# EAGLE board rev2 (EAGLE 7.2.0)
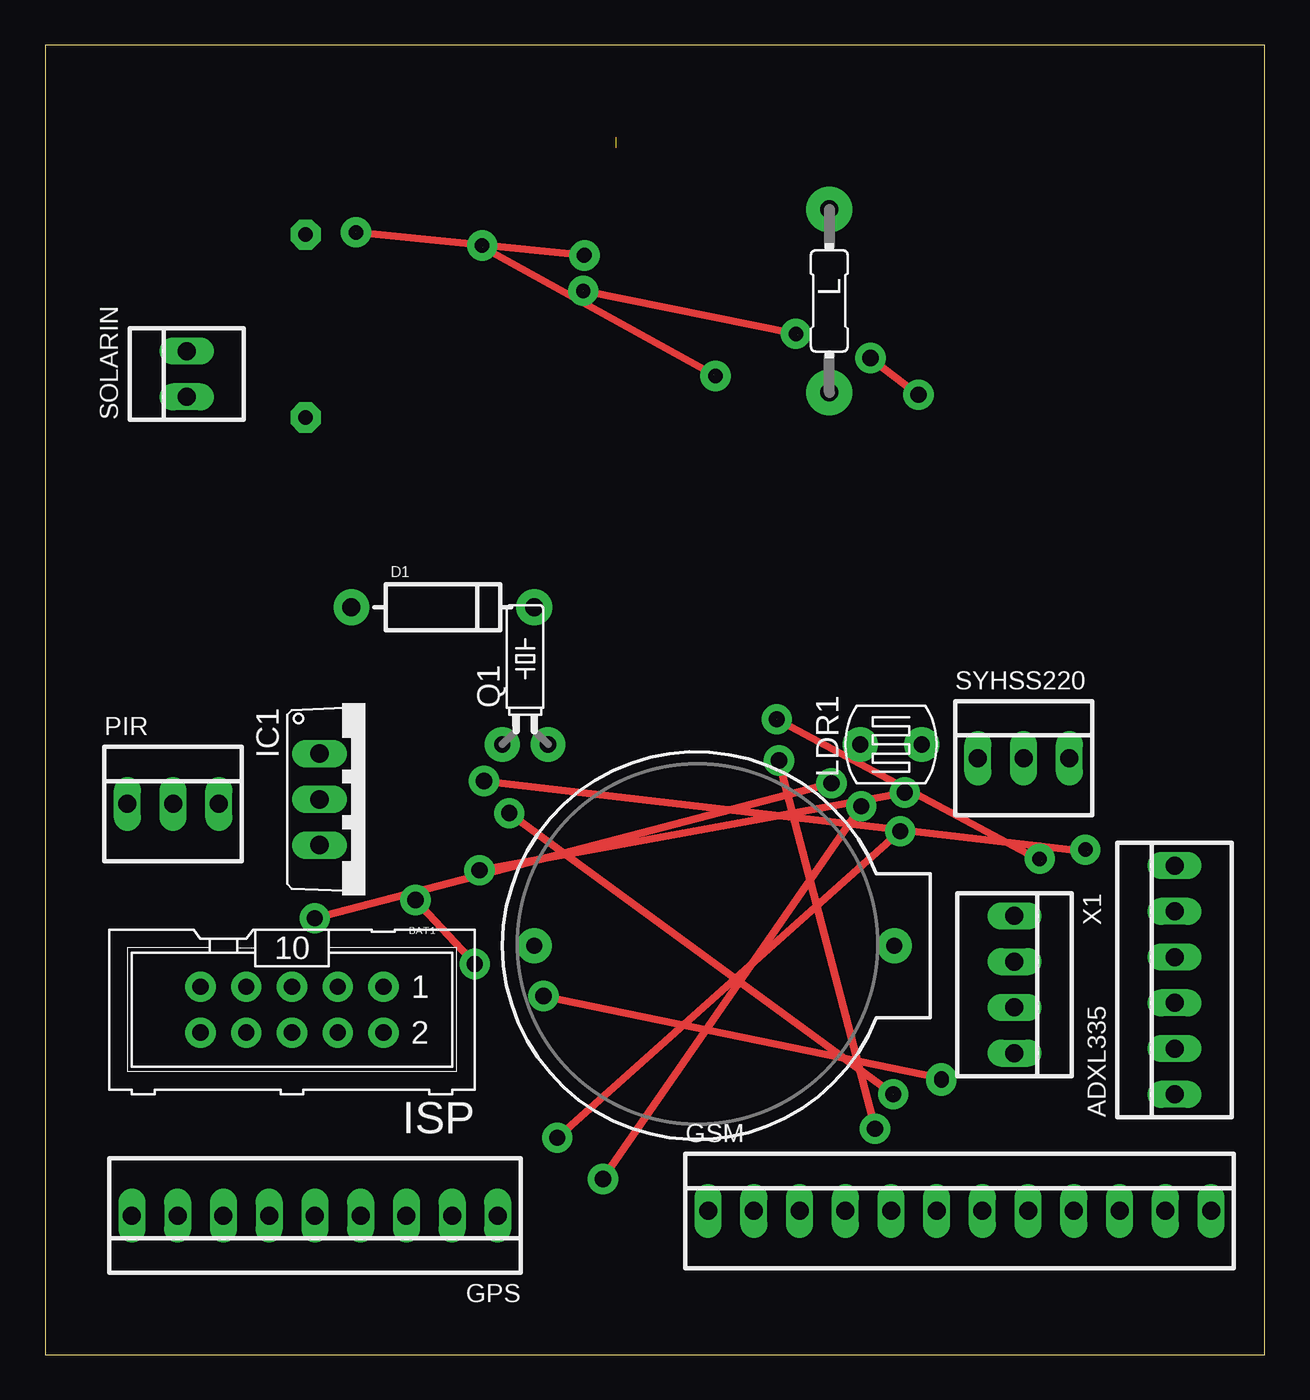
[diagram p0: board, top side]
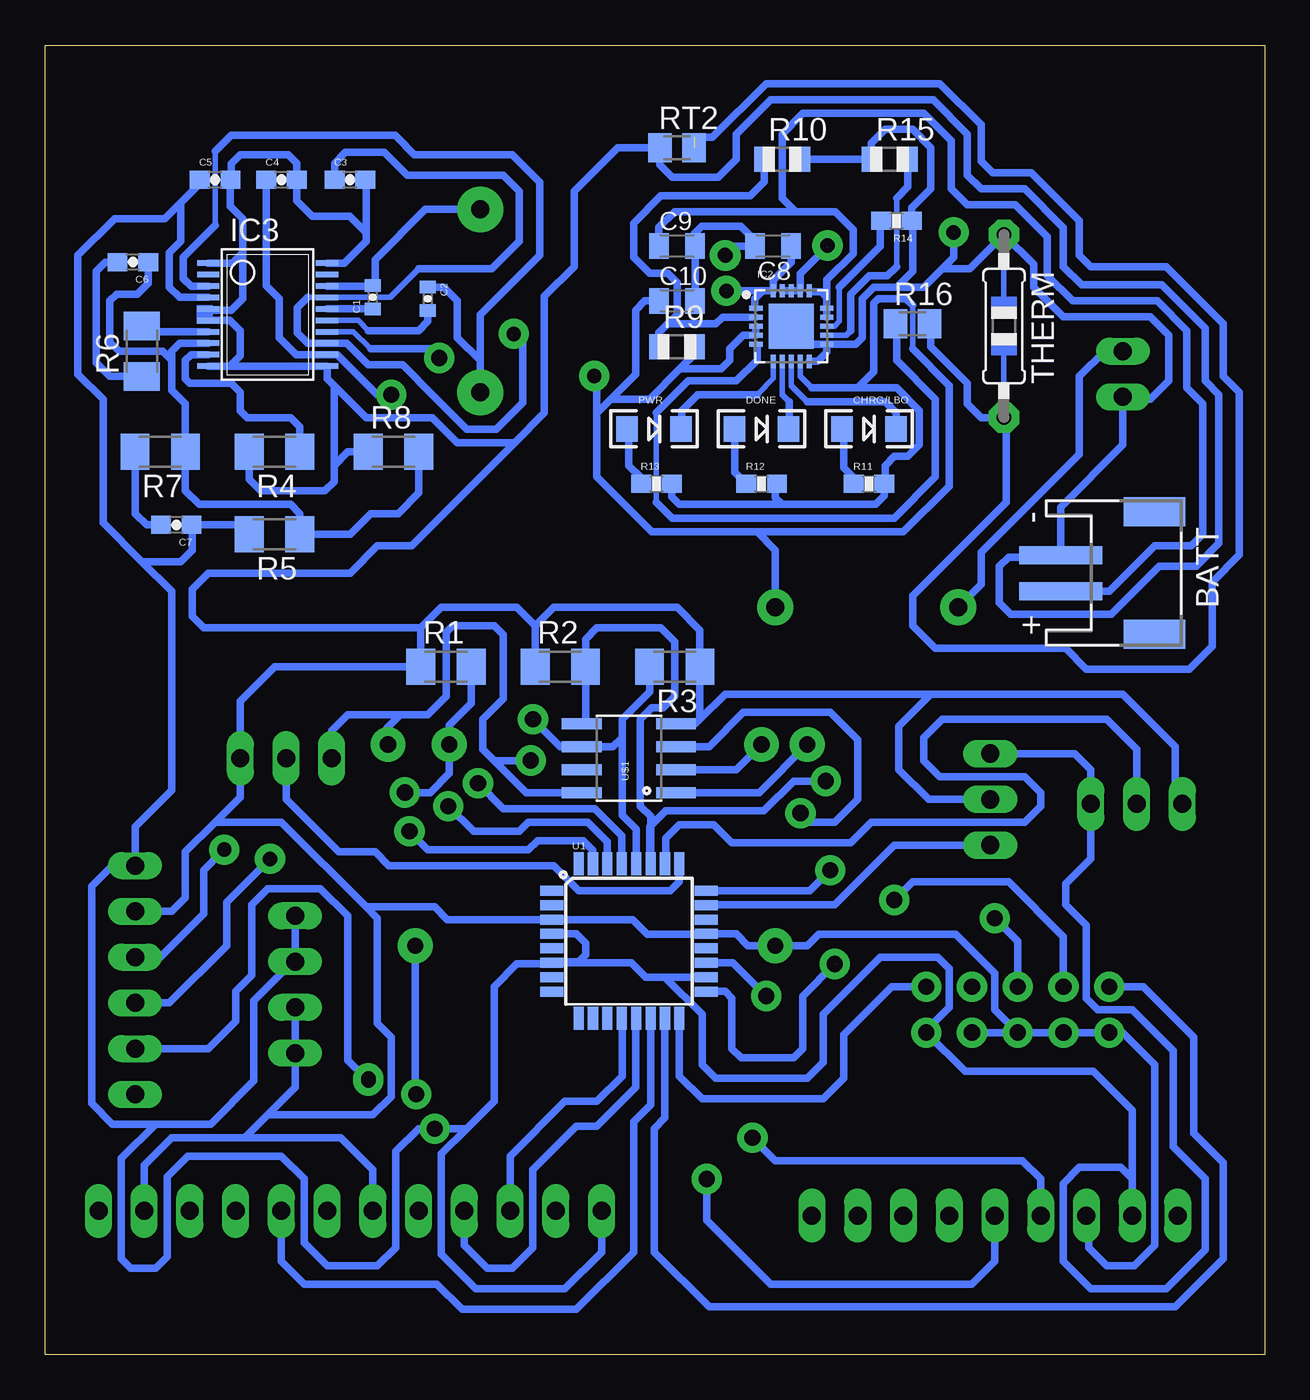
[diagram p1: board, bottom side, seen from below]

Size 67.74 x 72.76 mm. Coordinates in mm from the lower left corner, seen from the top.
Outline: 0,0 67.74,0 67.74,72.76 0,72.76 0,0
Copper layers (1*16): Top 0.035mm / dielectric 1.5mm / Bottom 0.035mm
Design rules "default": minimum track width 10mil, minimum drill 24mil, track to track 8mil, track to pad 8mil, pad to pad 8mil, via to via 8mil, smd to smd 8mil, copper to edge 40mil, drill to drill 8mil, minimum pad ring 10mil, minimum via ring 8mil, stop-mask expansion 4mil, vias tented up to drill 0mil, thermal gap 10mil

## Footprints (pad centres in the part's own frame; a part is rotated, then mirrored left to right if it is on the bottom)
22-23-2061 = drill 1 long: 1 -6.35,0; 2 -3.81,0; 3 -1.27,0; 4 1.27,0; 5 3.81,0; 6 6.35,0
BATTCOM_20MM_PTH = drill 0.9 pad 1.93: 1 20,0; 2 0,0
JST-PH-2-SMT-RA = smd 1 x 4.6: 1 1,-3.7; 2 -1,-3.7 | smd 1.6 x 3.4: NC1 -3.4,1.5; NC2 3.4,1.5
0402-CAP = smd 0.7 x 0.9: 1 -0.65,0; 2 0.65,0
0603-CAP = smd 1.1 x 1: 1 -0.85,0; 2 0.85,0
C0805K = smd 1.1 x 1.4: 1 -1,0; 2 1,0
LED-1206 = smd 1.2 x 1.4: A -1.5,0; C 1.5,0
DIODE-1N4001 = drill 1 pad 1.981: A -5.08,0; C 5.08,0
22-23-2091 = drill 1 long: 1 -10.16,0; 2 -7.62,0; 3 -5.08,0; 4 -2.54,0; 5 0,0; 6 2.54,0; 7 5.08,0; 8 7.62,0; 9 10.16,0
22-23-2121 = drill 1 long: 1 -13.97,0; 2 -11.43,0; 3 -8.89,0; 4 -6.35,0; 5 -3.81,0; 6 -1.27,0; 7 1.27,0; 8 3.81,0; 9 6.35,0; 10 8.89,0; 11 11.43,0; 12 13.97,0
TO220V = drill 1.016 long: 1 -2.54,-2.54; 2 0,-2.54; 3 2.54,-2.54
QFN20_4MM = smd 0.73 x 0.28: P$1 -1.965,1; P$2 -1.965,0.5; P$3 -1.965,0; P$4 -1.965,-0.5; P$5 -1.965,-1; P$11 1.965,-1; P$12 1.965,-0.5; P$13 1.965,0; P$14 1.965,0.5; P$15 1.965,1 | smd 0.28 x 0.73: P$6 -1,-1.965; P$7 -0.5,-1.965; P$8 0,-1.965; P$9 0.5,-1.965; P$10 1,-1.965; P$16 1,1.965; P$17 0.5,1.965; P$18 0,1.965; P$19 -0.5,1.965; P$20 -1,1.965 | smd 2.5 x 2.5: P$21 0,0
SSOP20 = smd 0.305 x 1.245: 1 -2.857,-3.302; 2 -2.222,-3.302; 3 -1.587,-3.302; 4 -0.952,-3.302; 5 -0.317,-3.302; 6 0.318,-3.302; 7 0.953,-3.302; 8 1.588,-3.302; 9 2.223,-3.302; 10 2.858,-3.302; 11 2.858,3.302; 12 2.223,3.302; 13 1.588,3.302; 14 0.953,3.302; 15 0.318,3.302; 16 -0.317,3.302; 17 -0.952,3.302; 18 -1.587,3.302; 19 -2.222,3.302; 20 -2.857,3.302
ML10 = drill 0.9 pad 1.676: 1 -5.08,-1.27; 2 -5.08,1.27; 3 -2.54,-1.27; 4 -2.54,1.27; 5 0,-1.27; 6 0,1.27; 7 2.54,-1.27; 8 2.54,1.27; 9 5.08,-1.27; 10 5.08,1.27
R0207/4 = drill 1 pad 2.54: 1 -5.08,0; 2 5.08,0
LDR338-54C = drill 0.9 pad 1.93: 1 0,1.702; 2 0,-1.702
22-23-2031 = drill 1 long: 1 -2.54,0; 2 0,0; 3 2.54,0
TC26H = drill 0.9 pad 1.93: 1 -1.27,0; 2 1.27,0
M1206 = smd 1.6 x 2: 1 -1.4,0; 2 1.4,0
M3216 = smd 1.6 x 2: 1 -1.4,0; 2 1.4,0
R0805 = smd 1.1 x 1.4: 1 -1,0; 2 1,0
0603-RES = smd 1.1 x 1: 1 -0.85,0; 2 0.85,0
M0805 = smd 1.3 x 1.6: 1 -0.95,0; 2 0.95,0
22-23-2021 = drill 1 long: 1 -1.27,0; 2 1.27,0
0805-THM = drill 0.813 pad 1.676 octagon: 1 -5.08,0; 2 5.08,0
TQFP32-08 = smd 1.27 x 0.559: 1 -4.293,2.8; 2 -4.293,2; 3 -4.293,1.2; 4 -4.293,0.4; 5 -4.293,-0.4; 6 -4.293,-1.2; 7 -4.293,-2; 8 -4.293,-2.8; 17 4.293,-2.8; 18 4.293,-2; 19 4.293,-1.2; 20 4.293,-0.4; 21 4.293,0.4; 22 4.293,1.2; 23 4.293,2; 24 4.293,2.8 | smd 0.559 x 1.27: 9 -2.8,-4.293; 10 -2,-4.293; 11 -1.2,-4.293; 12 -0.4,-4.293; 13 0.4,-4.293; 14 1.2,-4.293; 15 2,-4.293; 16 2.8,-4.293; 25 2.8,4.293; 26 2,4.293; 27 1.2,4.293; 28 0.4,4.293; 29 -0.4,4.293; 30 -1.2,4.293; 31 -2,4.293; 32 -2.8,4.293
SO08 = smd 0.61 x 2.21: 1 -1.905,-2.616; 2 -0.635,-2.616; 3 0.635,-2.616; 4 1.905,-2.616; 5 1.905,2.616; 6 0.635,2.616; 7 -0.635,2.616; 8 -1.905,2.616
22-23-2041 = drill 1 long: 1 -3.81,0; 2 -1.27,0; 3 1.27,0; 4 3.81,0

## Placement (x,y rotation side)
ADXL335  [22-23-2061]  62.74,20.83 90 top
BAT1  [BATTCOM_20MM_PTH]  27.18,22.73 0 top
BATT  [JST-PH-2-SMT-RA]  7.62,43.43 270 bottom
C1  0.1uF  [0402-CAP]  49.53,58.75 90 bottom
C2  0.1uF  [0402-CAP]  46.48,58.67 270 bottom
C3  4.7uF  [0603-CAP]  50.8,65.28 0 bottom
C4  4.7uF  [0603-CAP]  54.61,65.28 0 bottom
C5  47uF  [0603-CAP]  58.29,65.28 0 bottom
C6  3.3nF  [0603-CAP]  62.87,60.71 180 bottom
C7  33pF  [0603-CAP]  60.45,46.1 180 bottom
C8  10uF  [C0805K]  27.3,61.59 180 bottom
C9  10uF  [C0805K]  32.64,61.59 0 bottom
C10  10uF  [C0805K]  32.64,58.55 0 bottom
CHRG/LBO  YELLOW  [LED-1206]  21.97,51.44 0 bottom
D1  [DIODE-1N4001]  22.1,41.53 0 top
DONE  GREEN  [LED-1206]  27.94,51.44 0 bottom
GPS  22-23-2091  [22-23-2091]  14.99,7.75 180 top
GSM  22-23-2121  [22-23-2121]  50.8,8 0 top
IC1  LM35DT  [TO220V]  17.78,30.86 270 top
IC2  MCP73871  [QFN20_4MM]  26.29,57.15 0 bottom
IC3  PLL1700E  [SSOP20]  55.37,57.78 270 bottom
ISP  [ML10]  13.72,19.18 180 top
L  10uH  [R0207/4]  43.56,58.55 270 top
LDR1  [LDR338-54C]  46.99,33.91 90 top
PIR  22-23-2031  [22-23-2031]  7.11,30.61 0 top
PWR  RED  [LED-1206]  33.91,51.44 0 bottom
Q1  [TC26H]  26.67,33.91 0 top
R1  10Kohm  [M1206]  45.47,38.23 0 bottom
R2  4.7Kohm  [M1206]  39.12,38.23 0 bottom
R3  4.7Kohm  [M1206]  32.77,38.23 180 bottom
R4  47K  [M3216]  54.99,50.16 180 bottom
R5  1M  [M3216]  54.99,45.59 180 bottom
R6  60.4Kohm  [M3216]  62.36,55.75 90 bottom
R7  15Kohm  [M1206]  61.34,50.16 180 bottom
R8  249Kohm  [M1206]  48.39,50.16 0 bottom
R9  270K  [R0805]  32.64,56.01 0 bottom
R10  100K  [R0805]  26.8,66.42 0 bottom
R11  470  [0603-RES]  21.97,48.39 0 bottom
R12  470  [0603-RES]  27.94,48.39 0 bottom
R13  470  [0603-RES]  33.78,48.39 0 bottom
R14  8.2K  [0603-RES]  20.45,62.99 180 bottom
R15  100K  [R0805]  20.83,66.42 0 bottom
R16  1K  [M0805]  19.56,57.28 0 bottom
RT2  150K  [M0805]  32.64,67.06 0 bottom
SOLARIN  22-23-2021  [22-23-2021]  7.87,54.48 90 top
SYHSS220  22-23-2031  [22-23-2031]  54.36,33.15 0 top
THERM  10K  [0805-THM]  14.48,57.15 270 bottom
U1  ATMEGA328P_TQFP  [TQFP32-08]  35.31,22.99 0 bottom
U$1  DS1307SO8  [SO08]  35.31,33.15 90 bottom
X1  22-23-2041  [22-23-2041]  53.85,20.57 270 top

## Library data of the parts
ADXL335 = con-molex; MF: MOLEX; MPN: 22-23-2061; OC_FARNELL: 1462922; OC_NEWARK: 27C1933
BAT1 C5 D1 U$1 = SparkFun
BATT C8-C10 IC2 R9 R10 R15 R16 RT2 THERM = adafruit
C1 C2 = SparkFun-Capacitors; PROD_ID: CAP-12416
C3 C4 = SparkFun-Capacitors; PROD_ID: CAP-08280
C6 = SparkFun-Capacitors; PROD_ID: CAP-09633
C7 = SparkFun-Capacitors; PROD_ID: CAP-10142
CHRG/LBO = SparkFun-LED; PROD_ID: DIO-00820
DONE = SparkFun-LED; PROD_ID: DIO-00862
GPS = con-molex; MF: MOLEX; MPN: 22-23-2091; OC_FARNELL: 1756827; OC_NEWARK: 56H0450
GSM = con-molex; MF: MOLEX; MPN: 22-23-2121; OC_FARNELL: 1462935; OC_NEWARK: 56H0456
IC1 = lm35
IC3 = texas; MF: TEXAS INSTRUMENT CONNECTORS; MPN: PLL1700E; OC_FARNELL: unknown; OC_NEWARK: 36K3452
ISP = con-harting-ml; OC_FARNELL: unknown; OC_NEWARK: unknown
L LDR1 = gm-resistors
PIR SYHSS220 = con-molex; MF: MOLEX; MPN: 22-23-2031; OC_FARNELL: 1462950; OC_NEWARK: 30C0862
PWR = SparkFun-LED; PROD_ID: DIO-00809
Q1 = crystal; OC_FARNELL: unknown; OC_NEWARK: unknown
R1-R8 = resistor
R11-R13 = SparkFun-Resistors; PROD_ID: RES-07869
R14 = SparkFun-Resistors; PROD_ID: RES-10646
SOLARIN = con-molex; MF: MOLEX; MPN: 22-23-2021; OC_FARNELL: 1462926; OC_NEWARK: 25C3832
U1 = SparkFun-DigitalIC; PROD_ID: IC-09069
X1 = con-molex; MF: MOLEX; MPN: 22-23-2041; OC_FARNELL: 1462920; OC_NEWARK: 38C0355

## Nets
BATT: BATT.1 C9.1 IC2.P$14 IC2.P$15 IC2.P$16
GND: ADXL335.5 BAT1.2 BATT.2 C3.2 C4.2 C5.2 C8.2 C9.2 C10.2 GPS.7 GSM.6 GSM.11 IC1.2 IC2.P$10 IC2.P$11 IC2.P$21 IC3.1 IC3.5 IC3.6 IC3.10 IC3.11 IC3.20 ISP.4 ISP.6 ISP.8 ISP.10 PIR.1 R1.1 R2.1 R3.1 R4.2 R8.1 R10.2 R14.1 R15.1 RT2.1 SOLARIN.1 SYHSS220.3 THERM.1 U1.3 U1.21 U$1.4 X1.3 X1.4
N$3: GPS.5 U1.30
N$4: IC1.3 U1.23
N$5: LDR1.1 R1.2 U1.24
N$6: GPS.6 U1.31
N$7: SYHSS220.2 U1.25
N$8: PIR.2 U1.26
N$9: ADXL335.2 U1.19
N$10: ADXL335.3 R3.2 U1.28 U$1.6
N$11: GSM.3 U1.12
N$12: Q1.1 U$1.1
N$13: Q1.2 U$1.2
N$14: GSM.4 U1.13
N$15: BAT1.1 U$1.3
N$16: GSM.8 U1.14
N$17: IC2.P$2 R9.1 R10.1
N$18: IC2.P$6 PWR.C
N$20: ISP.1 U1.16
N$21: ISP.5 U1.29
N$22: ISP.7 U1.17
N$23: ISP.9 U1.15
N$27: DONE.C IC2.P$7
N$28: CHRG/LBO.C IC2.P$8
N$29: C1.1 IC3.16
N$30: CHRG/LBO.A R11.1
N$31: DONE.A R12.1
N$32: C2.2 IC3.15
N$33: PWR.A R13.1
N$34: IC2.P$12 R15.2
N$35: C1.2 IC3.18 L.1
N$36: C2.1 IC3.3 L.2
N$37: ADXL335.6 C5.1 C7.1 GPS.8 GSM.1 IC1.1 IC3.4 ISP.2 LDR1.2 PIR.3 R5.2 SYHSS220.1 U1.4 U1.6 U1.18 U$1.8 X1.1 X1.2
N$38: C6.1 IC3.8 R5.1 R7.1 R8.2
N$40: C6.2 R6.1
N$41: IC3.7 R6.2
N$42: ADXL335.4 R2.2 U1.27 U$1.5
N$43: C7.2 R7.2
N$44: C4.1 IC3.12 IC3.14
N$45: IC3.9 R4.1
N$46: IC2.P$13 R14.2
N$47: IC2.P$5 R16.1
N$48: R16.2 RT2.2 THERM.2
N$49: D1.A SOLARIN.2
OUT: C3.1 C8.1 IC2.P$1 IC2.P$20 IC3.13 IC3.17
VCC: C10.1 D1.C IC2.P$3 IC2.P$4 IC2.P$9 IC2.P$17 IC2.P$18 IC2.P$19 R9.2 R11.2 R12.2 R13.2

## Tracks (layer width: path | path; a pad name or v marks a point on that pad's centre or on a via)
BATT
  Bottom 0.406: 24.32,58.74 IC2.P$15 IC2.P$14 | IC2.P$16 25.23,59.05 24.64,59.05 24.32,58.74 | C9.1 33.64,62.63 32.77,63.5 26.04,63.5 | BATT.1 8.62,42.43 6.1,44.96 4.06,44.96 3.43,45.59 3.43,52.83 4.32,53.72 4.32,56.9 5.97,58.55 10.67,58.55 12.06,59.94 12.06,62.1 13.84,63.88 16.51,63.88 17.4,64.77 17.4,67.44 18.92,68.96 25.65,68.96 26.8,67.82 26.8,64.26 26.04,63.5 | 26.04,63.5 23.85,63.5 22.86,62.51 22.86,61.16 24.31,59.72 24.31,58.73 24.32,58.74
GND  (via drill 0.8 pad 1.68)  (1 unrouted)
  Top 0.406: v29.97,61.09 17.27,62.36
  Bottom 0.406: ISP.6 ISP.8 ISP.10 7.87,17.91 6.1,16.13 6.1,6.1 7.24,4.95 8.76,4.95 9.78,5.97 9.78,7.62 GPS.7 | ISP.6 ISP.4 | 46.86,40.39 46.87,40.38 R1.1 54.99,38.23 56.9,36.32 SYHSS220.3 56.9,30.99 58.29,29.59 | R3.1 31.37,40.26 32.64,41.53 39.5,41.53 40.52,40.51 R2.1 40.51,40.51 41.53,41.53 45.72,41.53 46.86,40.39 | R3.1 | R3.1 31.37,35.31 | 31.37,35.31 31.62,35.05 U$1.4 | IC1.2 18.67,30.86 20.32,32.51 20.32,34.92 18.54,36.7 | 18.54,36.7 7.87,36.7 4.95,33.78 4.95,30.99 PIR.1 | 58.67,57.53 IC3.6 58.61,57.47 | 56.77,61.21 56.77,63.12 57.44,63.79 C5.2 57.4,65.32 57.4,66.17 56.9,66.67 54.23,66.67 53.76,66.21 C4.2 53.76,64.1 52.91,63.25 50.83,63.25 49.91,62.33 | IC3.10 57.47,54.93 | 57.47,54.93 56.9,55.5 56.9,56.9 57.47,57.47 58.61,57.47 | R8.1 50.93,50.16 51.69,49.4 | 57.47,54.93 IC3.11 52.07,54.23 51.69,53.85 | R4.2 56.39,48.64 55.75,48.01 52.2,48.01 51.69,48.51 51.69,49.4 | IC3.1 57.34,60.64 56.77,61.21 | 56.77,61.21 56.77,58.67 57.4,58.04 58.61,58.04 IC3.5 58.67,57.53 | 58.61,57.47 58.67,57.53 | IC3.20 51.12,60.64 49.91,61.85 49.91,62.33 | 49.91,62.33 49.91,65.24 C3.2 | BAT1.2 27.05,22.73 | ISP.6 14.99,19.18 14.99,21.21 17.14,23.37 24.77,23.37 25.4,22.73 BAT1.2 | 49.91,24.89 46.1,24.89 45.4,24.19 U1.3 35.11,24.19 34.29,23.37 31.03,23.37 U1.21 29.36,23.39 28.7,22.73 BAT1.2 | 41.66,50.67 44.83,50.67 46.23,52.07 49.91,52.07 51.69,53.85 | 41.66,50.67 40.01,52.32 40.01,58.8 38.35,60.45 38.35,64.64 35.94,67.06 RT2.1 33.59,66.1 32.89,65.41 30.35,65.41 29.34,66.42 29.34,67.82 27.43,69.72 18.41,69.72 16.51,67.82 16.51,65.53 15.75,64.77 13.34,64.77 11.18,62.61 11.18,60.45 10.16,59.44 5.71,59.44 3.3,57.02 3.3,54.1 2.54,53.34 2.54,45.09 3.81,43.81 5.84,43.81 8.51,41.15 14.1,41.15 14.73,41.78 14.73,43.81 14.22,44.32 11.43,44.32 BATT.2 11.32,47.1 7.87,50.55 7.87,53.09
  Bottom 0.406: 41.66,50.67 47.37,44.96 49.28,44.96 50.8,43.43 58.67,43.43 59.56,42.55 59.56,41.02 58.93,40.39 46.86,40.39 | 18.54,36.7 29.97,36.7 31.37,35.31 | 51.69,49.4 51.69,53.85 | GSM.11 62.23,10.54 60.71,12.06 56.64,12.06 | 56.64,12.06 55.37,13.34 | 55.37,13.34 53.85,14.86 X1.4 X1.3 | GSM.6 49.53,10.29 51.31,12.06 56.64,12.06 | 58.29,29.59 59.94,27.94 59.94,25.4 60.71,24.64 ADXL335.5 | 58.29,29.59 54.61,29.59 49.91,24.89 | 49.91,24.89 49.28,24.26 49.28,18.41 48.51,17.65 48.51,14.35 49.53,13.34 55.37,13.34 | C10.2 C9.2 31.67,61.63 31.67,62.28 31.27,62.69 29.11,62.69 28.3,61.88 C8.2 29.46,61.59 v29.97,61.09 | IC2.P$11 24.32,55.69 24.82,55.19 IC2.P$10 | IC2.P$11 25.29,56.15 IC2.P$21 25.27,56.13 22.73,56.13 22.72,56.15 | IC2.P$11 22.72,56.15 | 22.72,56.15 22.35,56.52 22.35,58.67 21.72,59.31 20.45,59.31 | R10.2 R15.1 21.84,66.44 21.84,67.31 21.08,68.07 19.56,68.07 18.54,67.06 18.54,64.77 19.6,63.72 R14.1 19.56,62.95 19.56,60.2 20.45,59.31 | 20.45,59.31 18.92,59.31 17.91,60.33 | 17.91,60.33 16.38,60.33 THERM.1 12.83,60.58 12.83,59.31 11.18,57.66 6.35,57.66 5.33,56.64 5.33,54.1 6.35,53.09 7.87,53.09 | 7.87,53.09 SOLARIN.1 | 17.91,60.33 17.27,60.96 17.27,62.36
N$1  (via drill 0.9 pad 1.68)
  other vias: 23.88,21.72
N$2  (via drill 0.8 pad 1.68)
  other vias: 57.78,28.07
N$3  (via drill 0.9 pad 1.68)
  Top 0.406: v30.99,9.78 v45.34,30.48
  Bottom 0.406: GPS.5 14.99,5.21 16.26,3.94 27.43,3.94 30.99,7.49 v30.99,9.78 | U1.30 36.51,28.5 37.59,29.59 40.89,29.59 41.4,29.08 43.94,29.08 v45.34,30.48
N$4
  Bottom 0.406: IC1.3 20.57,28.32 23.88,25.02 30.98,25.02 U1.23
N$5  (via drill 0.9 pad 1.68)
  Top 0.406: v24.13,26.92 v47.75,31.24
  Bottom 0.406: 43.69,37.85 R1.2 | 44.2,38.1 R1.2 | R1.2 44.07,36.2 45.29,34.98 LDR1.1 45.29,32.31 46.35,31.24 v47.75,31.24 47.88,31.24 | U1.24 25.27,25.79 v24.13,26.92
N$6  (via drill 0.9 pad 1.68)
  Top 0.406: v28.45,12.06 v47.5,29.08
  Bottom 0.406: GPS.6 12.45,9.78 13.46,10.79 27.18,10.79 v28.45,12.06 | U1.31 37.31,28.04 37.85,28.57 40.39,28.57 40.89,28.07 46.48,28.07 v47.5,29.08
N$7
  Bottom 0.406: SYHSS220.2 54.36,30.86 51.44,27.94 49.4,27.94 48.64,27.18 39.5,27.18 38.1,25.78 33.02,25.78 32.51,26.29 U1.25
N$8
  Bottom 0.406: PIR.2 7.11,33.66 8.76,35.31 17.91,35.31 18.92,34.29 18.92,33.02 18.03,32.13 13.34,32.13 12.45,31.24 12.45,30.48 13.34,29.59 21.84,29.59 22.99,28.45 29.59,28.45 30.61,29.46 32.51,29.46 33.27,28.7 33.27,27.31 U1.26
N$9  (via drill 0.8 pad 1.68, 0.9 pad 1.68)
  Top 0.406: v49.78,15.37 v27.69,19.94
  Bottom 0.406: U1.19 29.53,21.79 v27.69,19.94 | ADXL335.2 58.67,17.02 57.15,18.54 57.15,20.19 56.26,21.08 56.26,25.02 55.37,25.91 52.45,25.91 50.93,24.38 50.93,16.38 49.91,15.37 v49.78,15.37
N$10  (2 unrouted)
  Top 0.406: 40.64,35.31 55.37,27.43
  Bottom 0.406: R3.2 34.17,36.83 35.69,35.31 35.69,34.29 | 34.92,27.3 U1.28 34.91,29.19 35.69,29.97 35.69,34.29 | 35.69,34.29 36.2,33.78 U$1.6 39.12,33.78 40.64,35.31 | ADXL335.3 60.83,19.56 57.66,22.73 57.66,25.15 55.37,27.43
N$11
  Bottom 0.406: GSM.3 41.91,11.05 38.86,14.1 37.08,14.1 35.69,15.49 35.69,18.68 U1.12
N$12
  Bottom 0.406: U$1.1 28.07,31.24 Q1.1
N$13
  Bottom 0.406: U$1.2 29.34,32.51 Q1.2
N$14
  Bottom 0.406: GSM.4 44.45,6.1 43.18,4.83 41.78,4.83 40.64,5.97 40.64,10.29 38.23,12.7 37.08,12.7 34.92,14.86 34.92,18.68 U1.13
N$15  (via drill 0.9 pad 1.68)  (1 unrouted)
  Top 0.406: 47.12,14.48 v25.78,30.1
  Bottom 0.406: U$1.3 30.86,33.78 28.96,35.69 24.13,35.69 22.61,34.16 22.61,30.86 23.88,29.59 25.27,29.59 v25.78,30.1 | BAT1.1 47.18,14.54 47.12,14.48
N$16
  Bottom 0.406: U1.14 34.11,13.9 35.05,12.95 35.05,5.71 38.23,2.54 44.58,2.54 45.97,3.94 53.34,3.94 54.61,5.21 GSM.8 54.61,6.48
N$17
  Bottom 0.406: IC2.P$2 30.11,57.65 30.48,57.28 33.15,57.28 | R9.1 33.66,56.02 33.66,56.77 33.15,57.28 | 27.81,66.42 R10.1 27.8,65.17 28.57,64.39 33.53,64.39 35.05,62.87 35.05,60.96 34.16,60.07 33.15,60.07 32.64,59.56 32.64,57.78 33.15,57.28
N$18
  Bottom 0.305: IC2.P$6 27.29,54.24 28.19,53.34
  Bottom 0.406: 28.19,53.34 31.5,53.34 32.38,52.45 32.38,51.46 PWR.C
N$19  (via drill 0.8 pad 1.68)
  other vias: 49.78,15.24
N$20
  Bottom 0.406: U1.16 32.51,15.49 31.24,14.22 24.51,14.22 23.37,15.37 23.37,17.78 20.7,20.45 ISP.1
N$21  (via drill 0.9 pad 1.68)
  Top 0.406: v14.99,24.26 v43.69,31.75
  Bottom 0.406: 35.69,27.26 U1.29 35.71,28.85 37.21,30.35 42.29,30.35 v43.69,31.75 | ISP.5 13.72,22.99 v14.99,24.26
N$22  (via drill 0.9 pad 1.68)  (1 unrouted)
  Top 0.406: 23.88,21.72 v20.57,25.27
  Bottom 0.406: ISP.7 11.18,23.24 14.22,26.29 19.56,26.29 v20.57,25.27 | 23.88,21.72 25.65,19.94 25.65,17.02 26.16,16.51 29.08,16.51 29.59,17.02 29.59,19.81 29.97,20.19 U1.17
N$23
  Bottom 0.406: ISP.9 6.73,20.45 3.94,17.65 3.94,12.32 2.29,10.67 2.29,5.33 4.95,2.67 30.86,2.67 33.91,5.71 33.91,12.57 33.31,13.18 U1.15
N$24  (via drill 0.9 pad 1.68)
  other vias: 47.12,14.48
N$25  (via drill 0.9 pad 1.68)
  other vias: 40.64,35.31
N$26  (via drill 0.8 pad 1.68)
  other vias: 55.24,27.56
N$27
  Bottom 0.305: IC2.P$7 26.79,53.33 26.42,52.96
  Bottom 0.406: 26.42,52.96 26.42,51.46 DONE.C
N$28
  Bottom 0.305: IC2.P$8 26.29,53.85 25.4,52.96
  Bottom 0.406: CHRG/LBO.C 20.47,52.35 21.08,52.96 25.4,52.96
N$29
  Bottom 0.406: 49.48,58.1 C1.1 IC3.16
N$30
  Bottom 0.406: R11.1 22.82,48.73 23.37,49.28 23.37,51.33 CHRG/LBO.A
N$31
  Bottom 0.406: DONE.A 29.44,49.04 R12.1
N$32
  Bottom 0.305: IC3.15 50.35,57.47 49.78,56.9
  Bottom 0.406: C2.2 46.48,57.4 46.99,56.9 49.78,56.9
N$33
  Bottom 0.406: R13.1 34.63,48.73 35.31,49.4 35.31,51.33 PWR.A
N$34
  Bottom 0.305: IC2.P$12 23.23,56.65 22.99,56.9 | 20.45,60.45 20.45,64.26
  Bottom 0.406: 22.99,56.9 22.99,58.93 21.97,59.94 20.95,59.94 20.45,60.45 | 20.45,64.26 19.81,64.9 19.81,66.41 R15.2
N$35
  Bottom 0.406: 49.45,59.37 C1.2 | L.1 46.61,63.63 49.4,60.83 49.4,59.53 C1.2 | IC3.18 49.56,59.37 C1.2
N$36
  Bottom 0.305: 58.29,62.74 58.29,66.85
  Bottom 0.406: 59.87,59.61 60.07,59.82 | 60.07,59.82 60.07,60.96 58.29,62.74 | L.2 43.56,55.24 | 43.56,55.24 44.83,56.52 44.83,58.55 45.59,59.31 46.47,59.31 C2.1 | IC3.3 59.63,59.37 59.87,59.61 | 59.87,59.61 59.89,59.61 60.07,59.79 60.07,59.82 | 58.29,66.85 57.4,67.74 48.28,67.74 47.7,67.16 47.7,67.13 47.24,66.67 41.78,66.67 40.26,65.15 40.26,61.09 43.56,57.78 43.56,55.24
N$37  (via drill 0.9 pad 1.68)
  Top 0.406: v46.1,12.57 v40.77,33.02
  Bottom 0.406: GSM.1 36.83,5.71 38.86,3.68 43.81,3.68 45.72,5.59 45.72,11.18 44.32,12.57 | 39.67,21.72 41.53,21.72 42.8,20.45 42.8,14.1 44.32,12.57 | 39.67,21.72 U1.6 | GPS.8 7.37,9.78 | 7.37,9.78 7.37,13.59 9.53,15.75 16.64,15.75 ISP.2 18.8,18.03 17.53,19.3 17.53,21.46 18.16,22.1 21.34,22.1 24.51,18.92 24.51,16.26 25.4,15.37 30.48,15.37 31.24,16.13 31.24,18.92 33.31,20.99 | IC1.1 10.54,33.4 9.65,32.51 PIR.3 9.65,27.56 11.05,26.16 11.05,25.02 9.91,23.88 9.91,19.81 9.27,19.18 7.37,19.18 5.08,16.89 5.08,11.56 3.3,9.78 3.3,5.84 5.46,3.68 9.65,3.68 11.18,5.21 11.18,9.53 10.29,10.41 8,10.41 7.37,9.78 | C5.1 59.14,65.06 60.2,64.01 | IC3.4 60.26,58.74 60.83,59.31 60.83,61.21 60.2,61.85 60.2,64.01 | R5.2 56.9,46.1 C7.1 59.56,46.06 59.56,44.7 60.2,44.07 62.36,44.07 | 60.2,64.01 61.09,63.12 63.88,63.12 65.91,61.09 65.91,54.48 64.52,53.09 64.52,46.23 62.36,44.07 | U1.6 38.16,21.79 38.1,21.84 | U1.6 35.18,21.79 34.38,20.99 33.31,20.99 | U1.18 33.31,20.99 | 48.01,35.56 46.48,35.56 45.47,36.58 45.47,40.13 45.09,40.51 42.8,40.51 42.29,40.01 42.29,36.45 43.43,35.31 43.43,33.66 42.8,33.02 | LDR1.2 48.77,33.98 48.77,34.8 48.01,35.56 | 48.01,35.56 50.93,35.56 51.82,34.67 SYHSS220.1 | U$1.8 41.02,31.24 42.8,33.02 | 42.8,33.02 v40.77,33.02 | U1.4 38.25,23.39 37.72,22.86 37.72,22.23 38.1,21.84 | 38.1,21.84 39.37,21.84 39.5,21.72 39.67,21.72 | 44.32,12.57 v46.1,12.57 46.99,12.57 48.26,11.3 48.26,5.97 49.28,4.95 52.07,4.95 53.34,6.22 53.34,9.78 54.61,11.05 59.82,11.05 60.96,9.91 60.96,5.46 61.59,4.83 62.99,4.83 63.5,5.33 63.5,10.92 61.59,12.83 | 61.59,12.83 58.55,12.83 56.13,15.24 56.13,19.68 53.98,21.84 X1.2 X1.1
  Bottom 0.406: 61.59,12.83 64.01,12.83 65.15,13.97 65.15,26.04 64.01,27.18 ADXL335.6 62.74,29.34 60.71,31.37 60.71,42.42 62.36,44.07
N$38
  Bottom 0.406: R8.2 46.99,47.88 48.13,46.74 49.66,46.74 50.8,45.59 R5.1 53.59,46.74 54.1,47.24 59.18,47.24 59.94,48 R7.1 59.94,52.83 60.71,53.59 60.71,55.24 | 60.71,55.24 61.21,55.75 63.63,55.75 64.14,56.26 64.14,58.55 63.75,58.93 62.61,58.93 62.02,59.52 C6.1 | 60.71,55.24 60.71,55.75 60.26,56.2 IC3.8
N$39  (via drill 0.8 pad 1.68)
  other vias: 37.24,54.38
N$40
  Bottom 0.406: R6.1 64.14,54.36 64.9,55.12 64.9,60.2 64.39,60.71 C6.2
N$41
  Bottom 0.406: IC3.7 62.04,56.83 R6.2
N$42  (via drill 0.9 pad 1.68)  (1 unrouted)
  Top 0.406: 57.91,27.94 v24.38,31.88
  Bottom 0.406: U$1.5 37.72,35.26 R2.2 37.72,39.75 37.08,40.39 33.53,40.39 32.77,39.62 32.77,36.58 33.4,35.94 34.04,35.94 34.67,35.31 34.67,30.48 34.11,29.91 U1.27 34.16,27.34 34.16,29.34 33.27,30.23 27.81,30.23 26.16,31.88 v24.38,31.88 | ADXL335.4 61.34,22.1 58.93,24.51 58.93,26.92 57.91,27.94
N$43
  Bottom 0.406: R7.2 62.74,46.74 62.1,46.1 C7.2
N$44  (via drill 0.9 pad 1.68)
  Top 0.406: v48.51,53.34 v45.85,55.37
  Bottom 0.305: IC3.14 50.61,56.83 49.66,55.88
  Bottom 0.406: C4.1 55.46,59.4 54.74,58.67 54.74,56.52 53.78,55.56 IC3.12 51.5,55.56 49.28,53.34 v48.51,53.34 | 49.66,55.88 46.35,55.88 v45.85,55.37
N$45
  Bottom 0.406: IC3.9 59.63,55.56 59.94,55.24 59.94,54.23 59.69,53.98 57.4,53.98 56.9,53.47 56.9,52.45 56.52,52.07 54.1,52.07 53.59,51.56 R4.1
N$46
  Bottom 0.305: IC2.P$13 23.88,57.15 23.62,57.4 23.62,59.31
  Bottom 0.406: 21.3,62.65 R14.2 21.34,62.95 21.34,61.59 23.62,59.31
N$47
  Bottom 0.305: 33.78,47.37 33.78,52.32
  Bottom 0.406: 33.78,47.37 32.89,46.48 20.57,46.48 18.29,48.77 18.29,53.09 20.45,55.24 20.45,57.22 R16.1 | 33.78,52.32 32,54.1 29.34,54.1 28.19,55.24 28.19,56.09 IC2.P$5
N$48  (1 unrouted)
  Bottom 0.406: R16.2 18.54,57.21 18.54,56.01 16.51,53.98 16.51,52.83 15.75,52.07 THERM.2 14.35,51.94 14.35,47.37 19.56,42.16 19.56,40.51 18.29,39.24 11.05,39.24 9.91,38.1 4.19,38.1 2.92,39.37 2.92,42.93 1.4,44.45 1.4,53.47 2.29,54.36 2.29,57.28 5.46,60.45 9.65,60.45 10.29,61.09 10.29,62.99 12.95,65.66 15.11,65.66 15.75,66.29 15.75,68.33 18.03,70.61 27.69,70.61 30.67,67.62 31.69,67.62
N$49
  Bottom 0.406: SOLARIN.2 8.89,55.75 10.29,54.36 10.29,50.04 15.75,44.58 15.75,42.8 D1.A
N$50  (via drill 0.8 pad 1.68)
  other vias: 24.28,61.62
N$51  (via drill 0.8 pad 1.68)
  other vias: 29.95,61.06
N$52  (via drill 0.8 pad 1.68)
  other vias: 29.9,59.11
N$53  (via drill 0.8 pad 1.68)
  other vias: 17.27,62.36
N$54  (1 unrouted)
OUT  (via drill 0.8 pad 1.68)  (1 unrouted)
  Top 0.406: 29.9,59.11 v41.71,56.72
  Bottom 0.305: 53.15,58.74 IC3.17 48.58,58.74 46.99,60.33
  Bottom 0.406: C8.1 26.29,60.71 27.29,59.71 IC2.P$20 27.88,59.12 27.94,59.05 | IC2.P$1 28.32,58.22 28.32,58.67 27.94,59.05 | C3.1 51.65,66.21 51.05,66.8 48.9,66.8 47.62,65.53 42.29,65.53 41.4,64.64 41.4,61.85 42.93,60.33 46.99,60.33 | 53.15,58.74 53.72,58.17 53.72,56.77 53.15,56.2 IC3.13 50.99,56.2 49.78,54.99 47.88,54.99 46.15,53.26 46.15,53.24 44.32,51.41 42.67,51.41 41.2,52.88 41.2,56.21 v41.71,56.72 | 27.94,59.05 27.91,59.05 27.86,59.11 29.9,59.11
VCC  (2 unrouted)
  Top 0.406: 24.31,61.52 37.13,54.46
  Bottom 0.305: IC2.P$9 25.79,54.36 25.15,53.72 | 19.56,55.88 19.56,58.29
  Bottom 0.406: IC2.P$17 IC2.P$18 IC2.P$19 IC2.P$17 25.78,59.11 25.78,60.05 24.31,61.52 | IC2.P$3 IC2.P$4 28.95,56.65 29.72,55.88 29.72,55.24 30.18,54.79 32.44,54.79 32.45,54.8 | 26.8,47.24 21.59,47.24 21.12,47.71 R11.2 21.08,48.43 21.08,49.4 20.57,49.91 19.81,49.91 19.18,50.55 19.18,52.45 20.45,53.72 22.61,53.72 | 26.8,47.24 27.18,47.62 27.18,48.3 R12.2 | 26.8,47.24 32.51,47.24 32.93,47.66 R13.2 33.02,48.48 | 25.15,53.72 22.61,53.72 | R9.2 31.64,55.61 32.45,54.8 | 32.45,54.8 34.16,53.09 36.32,53.09 | 36.32,53.09 37.03,52.38 | 37.03,52.38 37.08,52.32 37.08,48.77 34.04,45.72 28.19,45.72 | 28.19,45.72 20.07,45.72 17.53,48.26 17.53,53.85 19.56,55.88 | 19.56,58.29 19.94,58.67 21.46,58.67 21.72,58.42 21.72,54.61 22.61,53.72 | D1.C 27.18,44.7 28.19,45.72 | C10.1 34.42,58.55 34.92,58.04 34.92,54.48 36.04,53.37 | 36.04,53.37 36.25,53.16 | 36.04,53.37 36.04,53.29 36.17,53.16 36.25,53.16 | 36.25,53.16 36.32,53.09 | 37.03,52.38 37.06,52.38 37.08,52.35 37.08,54.41 37.13,54.46
(copper drawn outside any net)
  shapes: Bottom area x1